# Altium PCB PCB1.PcbDoc
Units mm, origin at the board's own origin, x right, y up, seen from the top; angles counter-clockwise.
Board outline 35 x 28 mm, 2 copper layers (Top Layer, Bottom Layer); 5 components, 12 nets, 37 pads, 0 vias.
Unrouted connection lines stored in the file: 1.
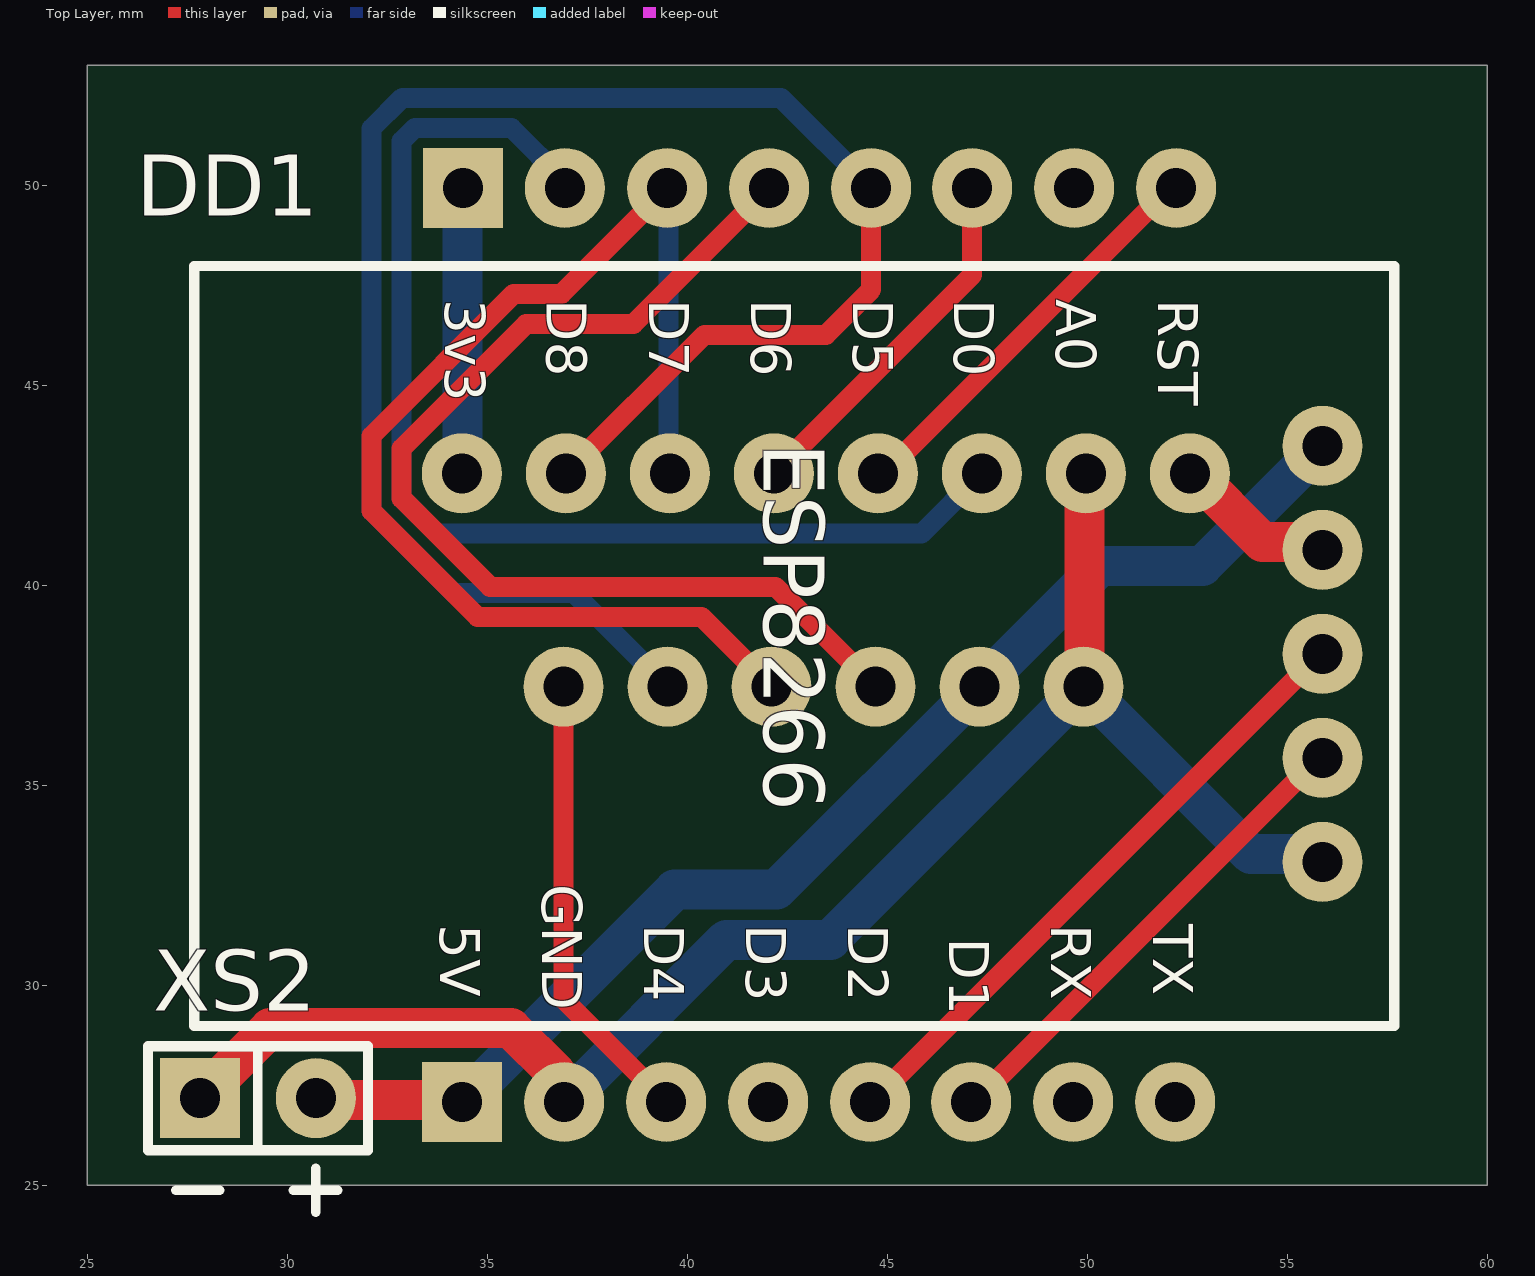
[diagram p0: Top Layer view]
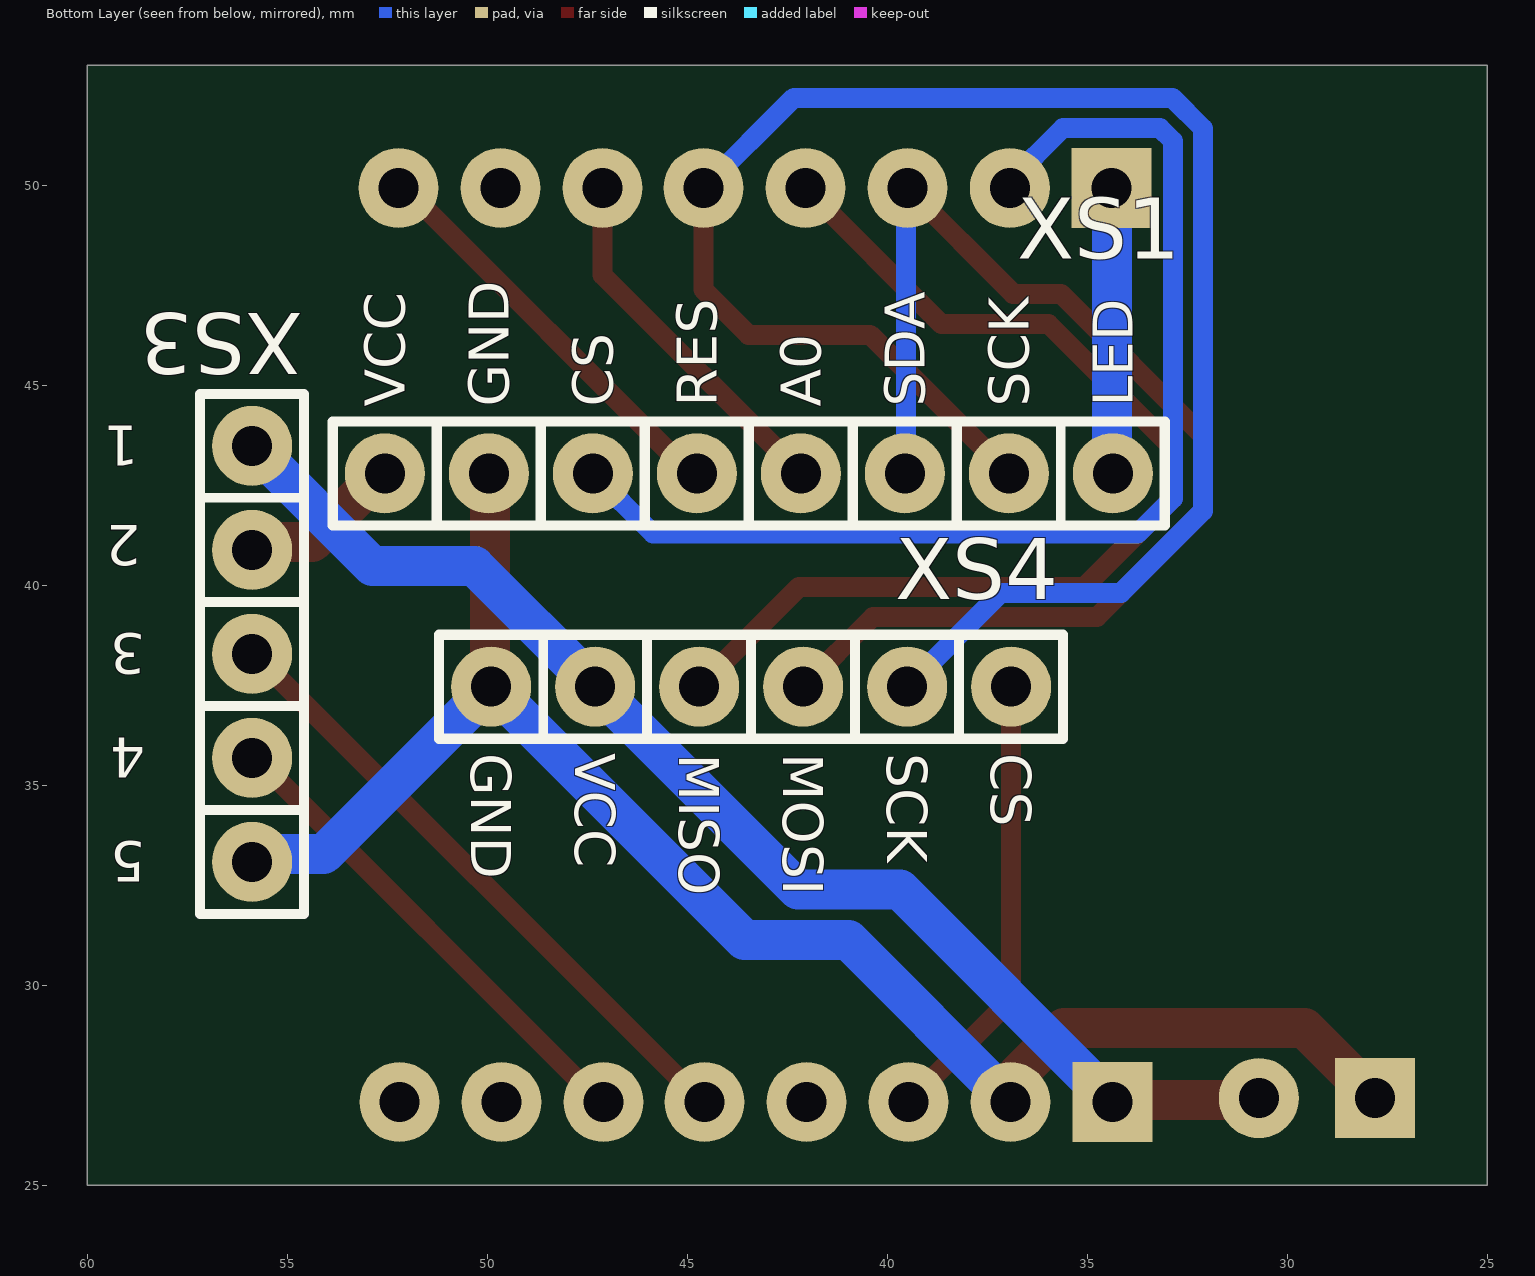
[diagram p1: Bottom Layer view, seen from below]

## Layer stack, top to bottom
Top Solder: solder mask 0.0102, Solder Resist, Dk 3.5
Top Layer: signal copper 0.0356
Dielectric 1: dielectric 0.32, FR-4, Dk 4.8
Bottom Layer: signal copper 0.0356
Bottom Solder: solder mask 0.0102, Solder Resist, Dk 3.5

## Board outline
25,25 25,53 60,53 60,25

## Design rules (kind name [scope] priority, off if disabled: settings)
Clearance [All] p1: gap=0.254 ignorepadtopadclearanceinfootprint=FALSE
PolygonConnect [All] p1: connectstyle=Relief reliefconductorwidth=0.254 reliefentries=4 polygonreliefangle="90 Angle" airgapwidth=0.254
RoutingVias [All] p1: holewidth=0.711 width=1.27 viastyle="Through Hole" minholewidth=0.711 minwidth=1.27 maxholewidth=0.711 maxwidth=1.27
SolderMaskExpansion [All] p1: expansion=0.102 istentingtop=FALSE
Width [All] p1: maxlimit=1.2 minlimit=0.5 preferedwidth=1 minimp=50.000000 maximp=50.000000 favimp=50.000000
30 further rules are at their usual default settings.

## Components (designator, comment, footprint, x,y, rotation, side; value= is the part's Value field where it differs from the comment)
DD1 "LOLINESP8266" ESP8266Wemos 42.672,38.481 r270 top
XS1 "TFT_Display" PinOutX8 35.664,42.799 r0 bottom
XS2 "Power" Power 30.713,27.178 r180 top
XS3 "ESP->Interface" PinOutX5 55.88,42.187 r270 bottom
XS4 "SDcard" PinOutX6 48.604,37.465 r180 bottom

## Footprints (in the part's own frame and the unit in brackets; to place one, negate y for a bottom-side part, rotate by r counter-clockwise, add the part's x,y. Pads: shape width x height; smd on the part's side, far side on the other; paste and mask are expansions set on the pad)
ESP8266Wemos [mm]
  round 2 hole 1: 1(-11.45,9.55) 2(-11.45,7) 3(-11.45,4.45) 4(-11.45,1.925) 5(-11.45,-0.625) 6(-11.45,-3.175) 7(-11.45,-5.735) 10(11.4,-5.75) 11(11.4,-3.2) 12(11.4,-0.65) 13(11.4,1.9) 14(11.4,4.425) 15(11.4,6.975) 16(11.4,9.525)
  rect 2x2 hole 1: 8(-11.45,-8.275) 9(11.4,-8.3)
  silkscreen extent -9.5,-15 9.5,15, body extent -12.9,-17.15 12.9,17.15, height 7.94
PinOutX5 [mm]
  round 2 hole 1: 1(-1.3,0) 2(1.3,0) 3(3.9,0) 4(6.5,0) 5(9.1,0)
  silkscreen extent -2.6,-1.3 10.4,1.3
PinOutX6 [mm]
  round 2 hole 1: 1(-1.3,0) 2(1.3,0) 3(3.9,0) 4(6.5,0) 5(9.1,0) 6(11.7,0)
  silkscreen extent -2.6,-1.3 13,1.3
PinOutX8 [mm]
  round 2 hole 1: 1(-1.3,0) 2(1.3,0) 3(3.9,0) 4(6.5,0) 5(9.1,0) 6(11.7,0) 7(14.3,0) 8(16.9,0)
  silkscreen extent -2.6,-1.3 18.2,1.3
Power [mm]
  round 2 hole 1: 1(0,0)
  rect 2x2 hole 1: 2(2.9,0)
  silkscreen extent -1.3,-1.3 4.2,2.85

## Nets (pads, with @x,y where several pads share a name; then routed paths per layer and width w, separated by ;. In a path a pad name is that pad's centre, name@x,y a point inside that pad or via, vN(x,y) a via of type N, cw(c..) or ccw(c..) an arc to the next point about the centre after c; other vN are vias at no path point)
+3.3v: DD1.8 XS1.1 XS1.8 XS3.2 | length 11.3
  Top Layer w1: XS1.8 52.658,42.799 54.379,41.078 55.689,41.078 XS3.2
  Bottom Layer w1: XS1.1 34.381,42.815 34.381,49.915 DD1.8
+5v: DD1.9 XS2.1 XS3.1 XS4.2 | length 32
  Top Layer w1: XS2.1 30.761,27.13 34.323,27.13 DD1.9
  Bottom Layer w1: DD1.9 39.681,32.39 42.229,32.39 XS4.2 50.322,40.483 52.876,40.483 XS3.1
GND: DD1.10 XS1.7 XS2.2 XS3.5 XS4.1 | length 41.3
  Top Layer w1: XS2.2 29.567,28.932 35.587,28.932 36.731,27.789 36.731,27.272 DD1.10 ; XS4.1 49.934,37.495 49.934,42.769 XS1.7
  Bottom Layer w1: DD1.10 40.977,31.136 43.575,31.136 XS4.1 54.091,33.278 55.689,33.278 XS3.5
NetDD1_1: DD1.1 XS1.5 | length 10.4
  Top Layer w0.5: XS1.5 44.927,42.799 52.059,49.931 DD1.1
NetDD1_3: DD1.3 XS1.4 | length 9.2
  Top Layer w0.5: XS1.4 47.122,47.757 DD1.3
NetDD1_4: DD1.4 XS1.2 XS4.5 | length 44.6
  Top Layer w0.5: XS1.2 40.429,46.264 43.47,46.264 44.597,47.391 DD1.4
  Bottom Layer w0.5: XS4.5 37.161,39.808 34.162,39.808 32.106,41.864 32.106,51.419 32.876,52.189 42.339,52.189 DD1.4
NetDD1_5: DD1.5 XS4.3 | length 26.9
  Top Layer w0.5: DD1.5 38.649,46.533 35.971,46.533 32.86,43.422 32.86,42.176 35.072,39.964 42.205,39.964 XS4.3
NetDD1_6: DD1.6 XS1.3 XS4.4 | length 30.8
  Top Layer w0.5: DD1.6 36.853,47.287 35.659,47.287 32.106,43.734 32.106,41.864 34.76,39.21 40.359,39.21 XS4.4
  Bottom Layer w0.5: DD1.6 39.531,49.897 39.531,42.833 XS1.3
NetDD1_7: DD1.7 XS1.6 | length 29.4
  Bottom Layer w0.5: DD1.7 36.937,50.104 35.606,51.435 33.188,51.435 32.86,51.107 32.86,42.176 33.741,41.295 45.86,41.295 XS1.6
NetDD1_11: DD1.11 XS4.6 | length 11.4
  Top Layer w0.5: XS4.6 36.904,29.649 DD1.11
NetDD1_13: DD1.13 XS3.3 | length 15.9
  Top Layer w0.5: DD1.13 44.623,27.081 55.829,38.287 XS3.3
NetDD1_14: DD1.14 XS3.4 | length 12.3
  Top Layer w0.5: DD1.14 47.185,27.081 55.791,35.687 XS3.4
pads on no net: DD1.2 DD1.12 DD1.15 DD1.16

## Silkscreen, mask and mechanical layers (free items; w line width, h text height)
Mechanical 1:
  the board outline again, w0.254

## Text inside footprints (layer, text, board x,y; h text height)
DD1: Top Overlay "RST" at 51.768,47.151 h1 r270; Top Overlay "A0" at 49.218,47.151 h1 r270; Top Overlay "D0" at 46.668,47.151 h1 r270; Top Overlay "D5" at 44.143,47.151 h1 r270; Top Overlay "D6" at 41.593,47.151 h1 r270; Top Overlay "D7" at 39.043,47.151 h1 r270; Top Overlay "D8" at 36.483,47.151 h1 r270; Top Overlay "3v3" at 33.943,47.151 h1 r270; Top Overlay "TX" at 51.651,31.527 h1 r270; Top Overlay "RX" at 49.101,31.527 h1 r270; Top Overlay "D1" at 46.551,31.194 h1 r270; Top Overlay "D2" at 44.026,31.527 h1 r270; Top Overlay "D3" at 41.476,31.527 h1 r270; Top Overlay "D4" at 38.926,31.527 h1 r270; Top Overlay "GND" at 36.376,32.527 h1 r270; Top Overlay "5V" at 33.826,31.527 h1 r270; Top Overlay "ESP8266" at 41.91,43.559 h1.52 r270
XS1: Bottom Overlay "VCC" at 52.064,44.466 h1 r270; Bottom Overlay "GND" at 49.464,44.466 h1 r270; Bottom Overlay "CS" at 46.864,44.466 h1 r270; Bottom Overlay "LED" at 33.864,44.466 h1 r270; Bottom Overlay "SDA" at 39.064,44.466 h1 r270; Bottom Overlay "A0" at 41.664,44.466 h1 r270; Bottom Overlay "SCK" at 36.464,44.466 h1 r270; Bottom Overlay "RES" at 44.264,44.466 h1 r270
XS3: Bottom Overlay "4" at 58.547,36.187 h1 r180; Bottom Overlay "2" at 58.667,41.5 h1 r180; Bottom Overlay "1" at 58.713,43.987 h1 r180; Bottom Overlay "3" at 58.547,38.787 h1 r180; Bottom Overlay "5" at 58.547,33.587 h1 r180
XS4: Bottom Overlay "SCK" at 40.004,35.798 h1 r90; Bottom Overlay "VCC" at 47.804,35.798 h1 r90; Bottom Overlay "MOSI" at 42.604,35.806 h1 r90; Bottom Overlay "MISO" at 45.204,35.789 h1 r90; Bottom Overlay "GND" at 50.404,35.798 h1 r90; Bottom Overlay "CS" at 37.404,35.798 h1 r90